# Altium PCB Main.PcbDoc
Units mil, origin at the board's own origin, x right, y up, seen from the top; angles counter-clockwise.
Board outline 1820 x 1990 mil, 4 copper layers (Top Layer, Mid Layer 1, Mid Layer 2, Bottom Layer), stack 62.327 mil thick; 41 components, 40 nets, 165 pads, 18 vias.
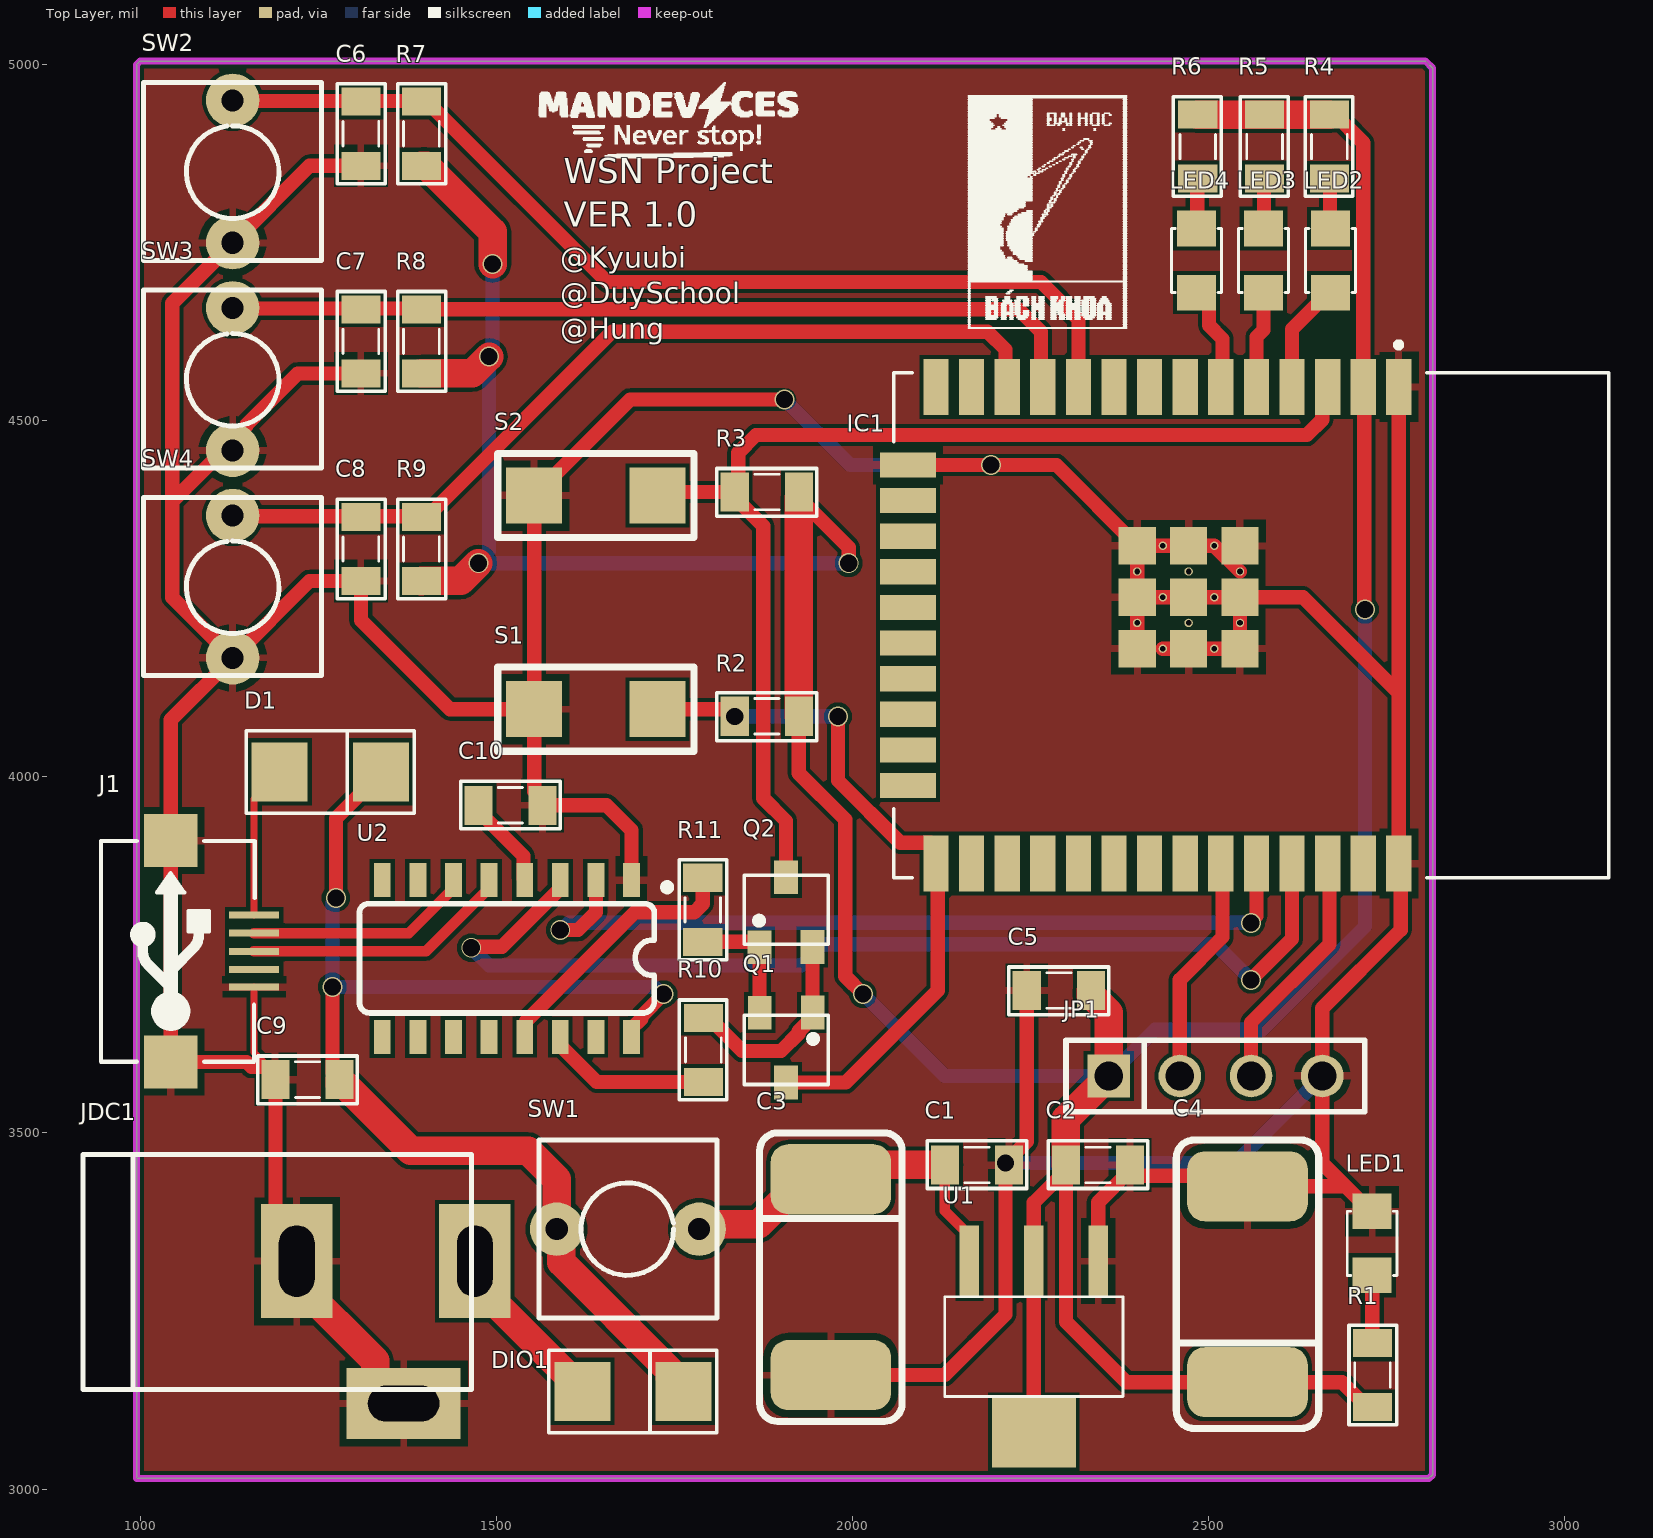
[diagram p0: Top Layer view]
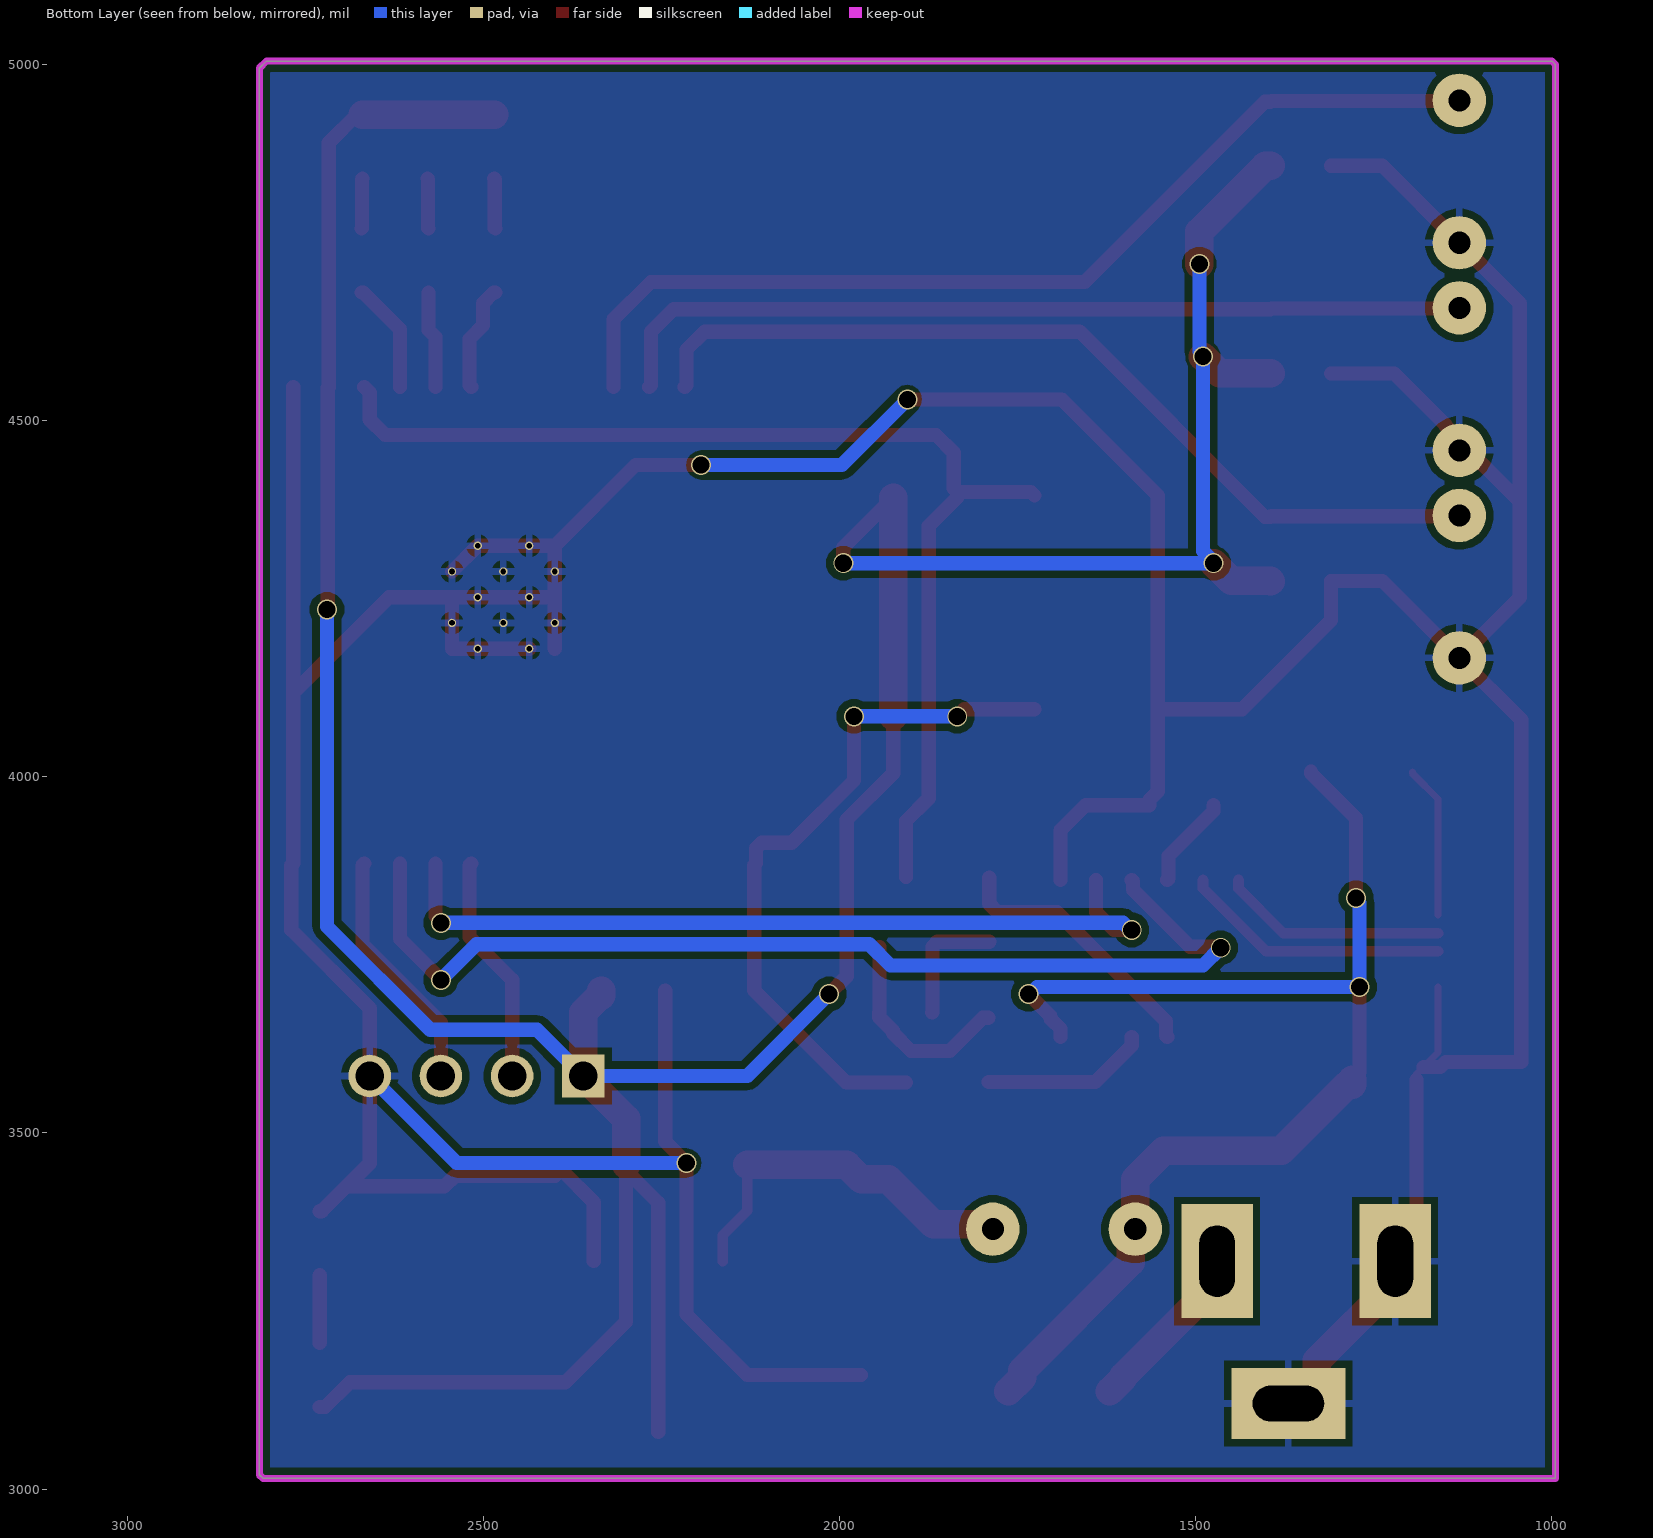
[diagram p1: Bottom Layer view, seen from below]
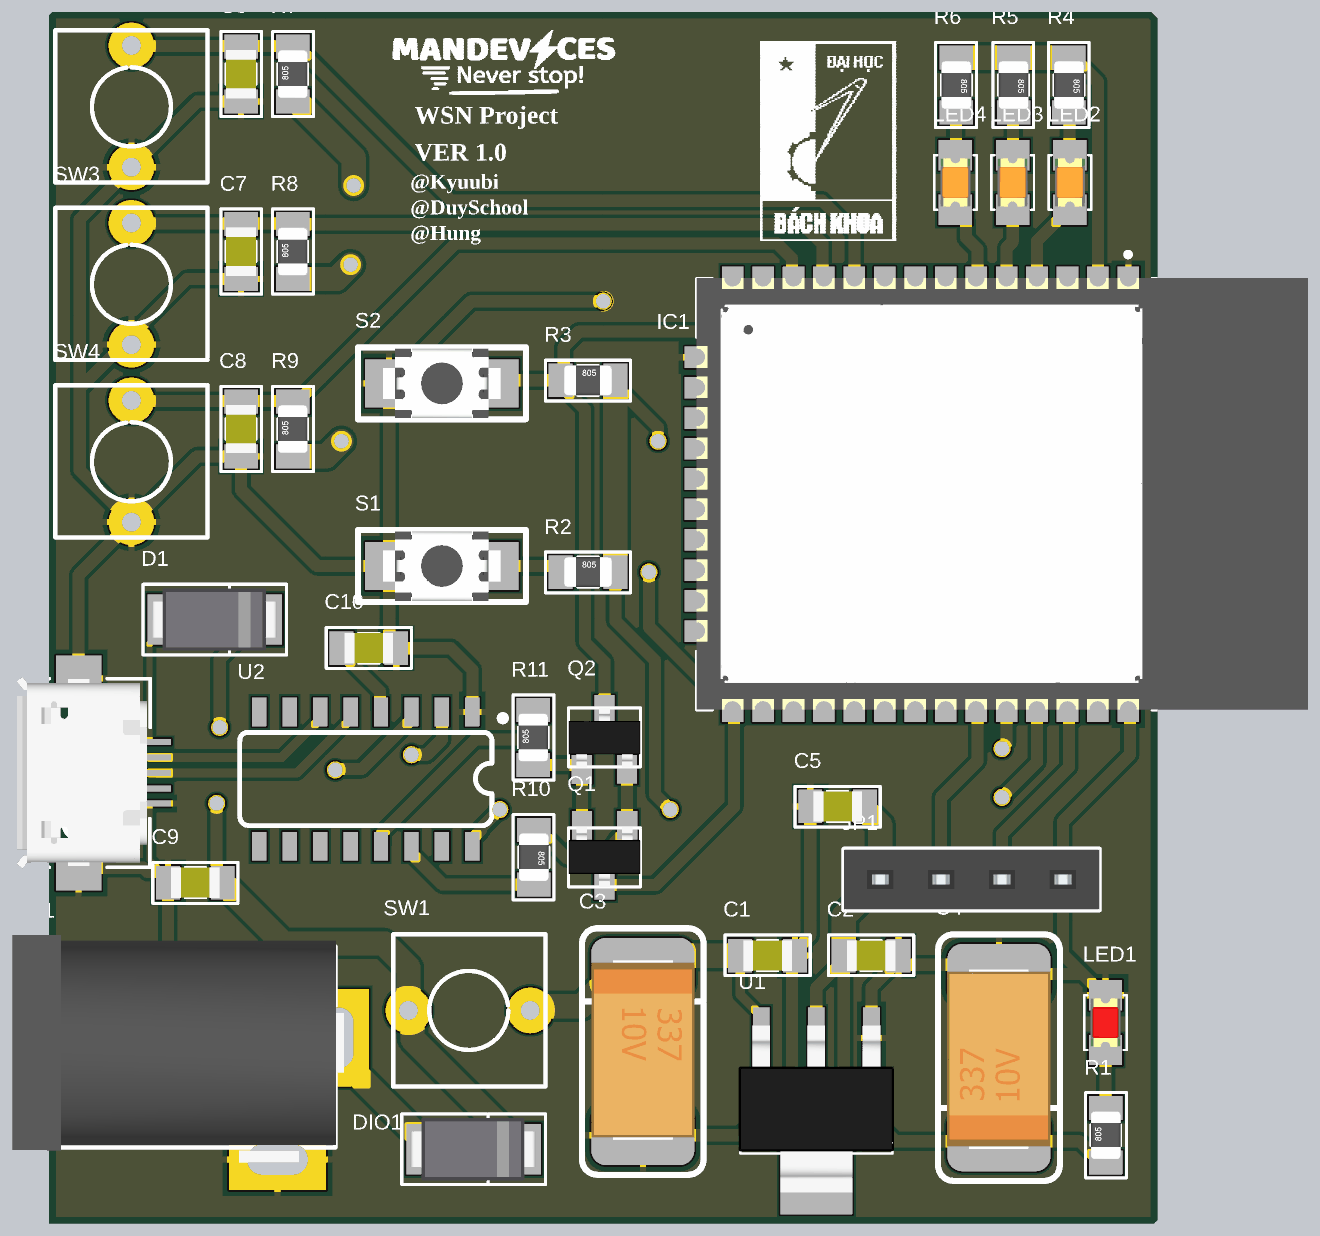
[diagram p2: 3D render of the assembled board from above, using the file's embedded part models]

## Layer stack, top to bottom
Top Solder: solder mask 0.4, Solder Resist, Dk 3.5
Top Layer: signal copper 1.4
Dielectric 2: core 2.756, FR-4, Dk 4.8
Mid Layer 1: signal copper 1.417
Dielectric 1: prepreg 51.181, Dk 4.2
Mid Layer 2: signal copper 1.417
Dielectric 3: core 2.756, Dk 4.2
Bottom Layer: signal copper 1.4
Bottom Solder: solder mask 0.4, Solder Resist, Dk 3.5

## Board outline
995,3015 995,5000 1000,5005 2805,5005 2815,4995 2815,3020 2810,3015

## Design rules (kind name [scope] priority, off if disabled: settings)
Clearance Polygon_ANT [(InNamedPolygon('Top_Layer-GND')) or  (InNamedPolygon('Mid_Layer_1-GND')) or (InNamedPolygon('Mid_Layer_2-GND')) or (InNamedPolygon('Bottom_Layer-GND')) vs InNet('RF')] p1: gap=10 ignorepadtopadclearanceinfootprint=FALSE
Clearance Polygon [(InNamedPolygon('Top_Layer-GND')) or  (InNamedPolygon('Mid_Layer_1-GND')) or (InNamedPolygon('Mid_Layer_2-GND')) or (InNamedPolygon('Bottom_Layer-GND'))] p2: gap=10 ignorepadtopadclearanceinfootprint=FALSE except(0: Arc-Hole Track-Hole SMDPad-Hole THPad-Hole Via-Hole Fill-Hole Poly-Hole Region-Hole Text-Hole)
Clearance Clearance_Top [OnLayer('Top Layer')] p3: gap=5.71 ignorepadtopadclearanceinfootprint=FALSE except(0: Arc-Hole Track-Hole SMDPad-Hole THPad-Hole Via-Hole Fill-Hole Poly-Hole Region-Hole Text-Hole)
Clearance [All] p4: gap=10 ignorepadtopadclearanceinfootprint=TRUE
ComponentClearance [All] p1 off: gap=10 collisioncheckmode=3 verticalgap=10 showdistances=FALSE
DiffPairsRouting [All] p1: maxlimit=10 minlimit=10 mostfreqgap=10 toplayer_minwidth=15 toplayer_maxwidth=15 toplayer_prefwidth=15 midlayer1_minwidth=15 midlayer1_maxwidth=15 midlayer1_prefwidth=15 midlayer2_minwidth=15 midlayer2_maxwidth=15 midlayer2_prefwidth=15 bottomlayer_minwidth=15 bottomlayer_maxwidth=15 bottomlayer_prefwidth=15 maxuncoupledlength=500
FabricationTestPointUsage TestPointUsage [All] p1: valid=0 allowmultiple=FALSE
FabricationTestpoint Testpoint [All] p1: side=3 testpointundercomponent=TRUE minsize=40 maxsize=100 preferedsize=60 minholesize=0 maxholesize=40 preferedholesize=32 testpointgrid=1 allowsidetop=TRUE allowsidebottom=TRUE usegrid=TRUE gridtolerance=0.01
Height [All] p1 off: minheight=0 maxheight=1000 prefheight=500
HoleSize [All] p1: absolutevalues=TRUE maxlimit=160 minlimit=3.94 maxpercent=80.000 minpercent=20.000
MinimumAnnularRing [All] p1 off: minimumring=6
PolygonConnect PolygonConnect_1 [isVia and innet(gnd)] p1: connectstyle=Direct reliefconductorwidth=10 reliefentries=4 polygonreliefangle="90 Angle" airgapwidth=10
PolygonConnect [All] p2: connectstyle=Relief reliefconductorwidth=10 reliefentries=4 polygonreliefangle="90 Angle" airgapwidth=10
RoutingVias [All] p1: holewidth=24 width=28 viastyle="Through Hole" minholewidth=20 minwidth=24 maxholewidth=24 maxwidth=28
SilkToSolderMaskClearance SilkscreenOverComponentPads [IsPad] p1: minsilkscreentomaskgap=10 clearancetoexposedcopper=TRUE
SolderMaskExpansion [All] p1: expansion=3 istentingtop=FALSE
Width [All] p1: maxlimit=40 minlimit=10 preferedwidth=20
23 further rules are at their usual default settings.

## Classes and differential pairs
component class POWER: C1 C2 C3 C4 DIO1 JDC1 LED1 R1 SW1 U1
component class Main: C5 C6 C7 C8 C9 C10 D1 IC1 J1 JP1 LED2 LED3 LED4 Q1 Q2 R2 R3 R4 R5 R6 R7 R8 R9 R10 R11 S1 S2 SW2 SW3 SW4 U2
differential pair D0: +D0_P -D0_N

## Components (designator, comment, footprint, x,y, rotation, side; value= is the part's Value field where it differs from the comment)
C1 "220nF" CAP_0805 2120,3610 r180 top value=33p
C2 "100nF" CAP_0805 2290,3610 r180 top value=33p
C3 "220uF/10V" CAP_7343 1970,3300 r270 top
C4 "220uF/10V" CAP_7343 2555,3285 r90 top
C5 "10uF" CAP_0805 2345,3545 r0 top value=33p
C6 "10uF" CAP_0805 1465,4958 r90 top value=33p
C7 "10uF" CAP_0805 1465,4666.5 r90 top value=33p
C8 "10uF" CAP_0805 1465,4375 r90 top value=33p
C9 "10uF" CAP_0805 1290,3420 r0 top value=33p
C10 "100nF" CAP_0805 1465,4115 r180 top value=33p
D1 "Diode SMD" DIO-214AC(SMA) 1270,4005 r180 top value=1N5007
DIO1 "Diode SMD" DIO-214AC(SMA) 1695,3135 r180 top value=1N5007
IC1 "ESP32-WROOM-32" MODULE_ESP32-WROOM-32 2560.43,4212.87 r270 top
J1 "USB-5" USB-M1 1160,3755 r90 top
JDC1 "Jac DC" DC-IN 1345,3220 r0 top
JP1 "Oled" JP4-C1T 2360,3580 r0 top
LED1 "LED" LED-0805-Red 2730,3300 r90 top value="LED 3 ly Single Colour"
LED2 "LED" LED-0805-Orange 2671.5,4770 r270 top value="LED 3 ly Single Colour"
LED3 "LED" LED-0805-Orange 2577.5,4770 r270 top value="LED 3 ly Single Colour"
LED4 "LED" LED-0805-Orange 2483.5,4770 r270 top value="LED 3 ly Single Colour"
Q1 "2SC1815" SOT23D 1907.07,3620 r180 top value=C1815
Q2 "2SC1815" SOT23D 1907.07,3810 r0 top value=C1815
R1 "1k" RES-SMD-0805 2730.5,3160 r90 top
R2 "10k" RES-SMD-0805 1880,4085 r0 top
R3 "10k" RES-SMD-0805 1880,4400 r0 top
R4 "10k" RES-SMD-0805 2670,4885 r270 top
R5 "10k" RES-SMD-0805 2579,4885 r270 top
R6 "10k" RES-SMD-0805 2485,4885 r270 top
R7 "10k" RES-SMD-0805 1395,4903 r90 top
R8 "10k" RES-SMD-0805 1395,4611.5 r90 top
R9 "10k" RES-SMD-0805 1395,4320 r90 top
R10 "10k" RES-SMD-0805 1791,3616.66 r270 top
R11 "10k" RES-SMD-0805 1790,3813.34 r90 top
S1 "SW-SMD" "SW 3x2x4" 1640,4095 r180 top
S2 "SW-SMD" "SW 3x2x4" 1640,4395 r180 top
SW1 "SW" SW2 1585,3365 r0 top value="SW chip 2 pin"
SW2 "SW" SW2 1130,4750 r90 top value="SW chip 2 pin"
SW3 "SW" SW2 1130,4458.5 r90 top value="SW chip 2 pin"
SW4 "SW" SW2 1130,4167 r90 top value="SW chip 2 pin"
U1 "LM1117-ADJ" LM1117-SOP 2255,3270 r180 top
U2 "CH340C" SOP-16 1515,3745 r180 top

## Footprints (in the part's own frame and the unit in brackets; to place one, negate y for a bottom-side part, rotate by r counter-clockwise, add the part's x,y. Pads: shape width x height; smd on the part's side, far side on the other; paste and mask are expansions set on the pad)
CAP_0805 [mil]
  rect 39.37x55 smd: 1(-100,155) 2(-10,155)
  silkscreen extent -125,121 15,188, body extent -95,130 -15,180, height 24
CAP_7343 [mm] "Capacitor Tantalum 7343"
  rrect50% 2.5x4.3 smd: 1(-3.429,0) 2(3.556,0)
  silkscreen extent -5.08,-2.54 5.21,2.54, body extent -3.75,-2.14 3.75,2.16, height 2.8
DC-IN [mil] "Jac DC input"
  rect 100x160 hole 50 slot 100 at 90 deg: 1(125,100) 2(-125,100)
  rect 160x100 hole 50 slot 100 at 0 deg: 3(25,-100)
  silkscreen extent -425,-80 120,250, body extent -410,-105 134,269, height 434
DIO-214AC(SMA) [mm] "DO-214AC Diode Smallest Size"
  rect 2x2.1 smd: 1(1.88,-0.051) 2(-1.732,-0.051)
  silkscreen extent -2.92,-1.52 3.07,1.42, body extent -2.5,-1.35 2.7,1.25, height 2.4
JP4-C1T [mm] "4 row, straight, gold plating"
  rect 1.52x1.52 hole 1.02: 1(0,0)
  round 1.52 hole 1.02: 2(2.54,0) 3(5.08,0) 4(7.62,0)
  silkscreen extent -1.52,-1.27 9.14,1.27, body extent -1.52,-1.25 9.14,1.25, height 8.51
LED-0805-Orange [mil]
  rect 50x55 smd: 1(0,0) 2(90,0)
  silkscreen extent 0,-35 90,35, body extent 5,-25 85,25, height 43
LED-0805-Red [mil]
  rect 50x55 smd: 1(0,0) 2(90,0)
  silkscreen extent 0,-35 90,35, body extent 5,-25 85,25, height 43
LM1117-SOP [mm]
  rect 0.7x2.54 smd: 1(-2.3,-1.27) 2(0,-1.27) 3(2.3,-1.27)
  rect 3x2.54 smd: 2(0,4.826)
  silkscreen extent -3.18,0 3.17,3.56, body extent -3.25,-1.78 3.25,5.18, height 1.68
MODULE_ESP32-WROOM-32 [mm]
  rect 2x0.9 smd: 1(-8.5,5.26) 2(-8.5,3.99) 3(-8.5,2.72) 4(-8.5,1.45) 5(-8.5,0.18) 6(-8.5,-1.09) 7(-8.5,-2.36) 8(-8.5,-3.63) 9(-8.5,-4.9) 10(-8.5,-6.17) 11(-8.5,-7.44) 12(-8.5,-8.71) 13(-8.5,-9.98) 14(-8.5,-11.25) 25(8.5,-11.25) 26(8.5,-9.98) 27(8.5,-8.71) 28(8.5,-7.44) 29(8.5,-6.17) 30(8.5,-4.9) 31(8.5,-3.63) 32(8.5,-2.36) 33(8.5,-1.09) 34(8.5,0.18) 35(8.5,1.45) 36(8.5,2.72) 37(8.5,3.99) 38(8.5,5.26)
  rect 0.9x2 smd: 15(-5.715,-12.25) 16(-4.445,-12.25) 17(-3.175,-12.25) 18(-1.905,-12.25) 19(-0.635,-12.25) 20(0.635,-12.25) 21(1.905,-12.25) 22(3.175,-12.25) 23(4.445,-12.25) 24(5.715,-12.25)
  rect 1.33x1.33 smd: 39_1(-2.835,-0.405) 39_2(-1,-0.405) 39_3(0.835,-0.405) 39_4(-2.835,-2.24) 39_5(-1,-2.24) 39_6(0.835,-2.24) 39_7(-2.835,-4.075) 39_8(-1,-4.075) 39_9(0.835,-4.075)
  round 0.3 hole 0.2: 39_10(-1.917,-0.405) 39_11(-0.082,-0.405) 39_12(-2.835,-1.322) 39_13(-1,-1.322) 39_14(0.835,-1.322) 39_15(-1.917,-2.24) 39_16(-0.082,-2.24) 39_17(-2.835,-3.157) 39_18(-1,-3.157) 39_19(0.835,-3.157) 39_20(-1.917,-4.075) 39_21(-0.082,-4.075)
  silkscreen extent -10.1,-12.75 9,12.75, body extent -9.02,-12.75 8.98,12.75, height 3.2
RES-SMD-0805 [mil]
  rect 39.37x55 smd: 1(-45,0) 2(45,0)
  silkscreen extent -70,-34 70,33, body extent -39,-25 39,25, height 31
SOP-16 [mm]
  rect 0.6x1.2 smd: 1(-4.445,-2.8) 2(-3.175,-2.8) 3(-1.905,-2.8) 4(-0.635,-2.8) 5(0.635,-2.8) 6(1.905,-2.8) 7(3.175,-2.8) 8(4.445,-2.8) 9(4.445,2.8) 10(3.175,2.8) 11(1.905,2.8) 12(0.635,2.8) 13(-0.635,2.8) 14(-1.905,2.8) 15(-3.175,2.8) 16(-4.445,2.8)
  silkscreen extent -5.84,-2.67 5.26,1.95, body extent -4.95,-3.47 4.95,3.47, height 1.75
SOT23D [mm] "SOT 23C - 1-3-2 - BCE"
  rect 0.85x1.2 smd: 1(-0.95,-1.25) 2(0.94,-1.245) 3(0,1.25)
  silkscreen extent -1.5,-1.14 1.5,1.32, body extent -1.5,-1.17 1.5,1.33, height 1.06
SW2 [mil] "SW button 2pin, 250x 250 mil"
  round 75 hole 31: 1(0,0) 2(200,0)
  silkscreen extent -25,-125 225,125
"SW 3x2x4" [mm]
  rect 2x2 smd: 1(-2.2,0) 2(2.2,0)
  silkscreen extent -3.5,-1.5 3.5,1.5, body extent -2.45,-1.45 2.45,1.45, height 2
USB-M1 [mil]
  rect 10x70 smd: 1(51.18,0) 2(25.59,0) 3(0,0) 4(-25.59,0) 5(-50,0)
  rect 74.8x74.8 smd: 5(-155.51,116.84) 5(155.51,116.84)
  silkscreen extent -155,-1 155,215, body extent -157,5 158,218, height 107

## Part data
C1 C2 C5 C6 C7 C8 C9 C10: library part CapSMD, "Capacitor", LatestRevisionDate=17-Jul-2002, LatestRevisionNote="Re-released for DXP Platform.", PackageReference=RAD-0.3, Published=8-Jun-2000, Publisher="Altium Limited"
C3 C4: library part CAP_TAN_SMD, "Polazied Tantalum Capacitor"
D1 DIO1: "Default Diode", Code - JEDEC=DO-214-AB, Published=8-Jun-2000, Publisher="Altium Limited", Revision="July-2002: Re-released for DXP Platform."
IC1: "Bluetooth, WiFi Transceiver Module 2.4GHz ~ 2.5GHz Surface Mount", Package="Module Espressif Systems", Digi-Key_Part_Number=1904-1010-1-ND, Digi-Key_Purchase_URL=https://www.digikey.com/product-detail/en/espressif-systems/ESP32-WROOM-32/1904-1010-1-ND/8544305?utm_source=snapeda&utm_medium=aggregator&utm_campaign=symbol, MF="Espressif Systems", MP=ESP32-WROOM-32, SnapEDA_Link=https://www.snapeda.com/parts/ESP32-WROOM-32/Espressif%20Systems/view-part/2753322/?ref=snap
J1: Manufacturer=FCI, Manufacturer Part Number=10118193-0001LF, Supplier Part Number 1=609-4616-1-ND, .Checked PCB=RF, .Checked SCH=MM, .Creator=MM, Category="Connectors, Interconnects", ComponentLink1Description=http://portal.fciconnect.com/Comergent//fci/drawing/10118193.pdf, ComponentLink1URL=http://portal.fciconnect.com/Comergent//fci/drawing/10118193.pdf, Connector Type="USB - micro B", Features="Shielded, Solder Retention", Gender=Receptacle, Ingress Protection=-, Mounting Type="Surface Mount, Right Angle, Horizontal", Number of Contacts=5, Packaging="Cut Tape (CT)", Pricing 1="1=0.46, 10=0.433, 25=0.3712, 50=0.3156, 100=0.3032, 250=0.27224, 500=0.25988 (USD)", RoHS="RoHS Compliant", Specifications="USB 2.0", Stock 1=28642, Supplier 1=Digi-Key
JDC1: library part DCIN, "Jac DC input"
JP1: library part JP4, "WR-PHD 2.54 mm Angled Socket Header", Manufacturer="W¨¹rth Elektronik eiSos GmbH", partNo=613004143121, ComponentLink1 Description=Manufacturer, ComponentLink1URL=http://www.we-online.com, ComponentLink2 Description=Datasheet, ComponentLink2URL=http://katalog.we-online.de/em/datasheet/6130xx143121.pdf, Created by="Karrer Zheng", Created Date="29 March 2013", NoPins=04
LED1 LED2 LED3 LED4: "LED Single colour Green and Red"
Q1 Q2: library part C1815, "NPN 600mW, ECB"
R1 R2 R3 R4 R5 R6 R7 R8 R9 R10 R11: library part "Resistor - SMD", "Resistor SMD", Manufacturer="Generic Components", Class=Passive, Published=08/06/2000, Publisher="Altium Hobart Technology Centre"
S1 S2: "Switch", LatestRevisionDate=17-Jul-2002, LatestRevisionNote="Re-released for DXP Platform.", PackageReference=SPST-2, Published=24-Mar-1999, Publisher="Altium Limited"
SW1 SW2 SW3 SW4: library part SW2, "Switch button 2 pin"
U1: "800mA Low-Dropout Linear Regulator", Creator="Nguyen Ba Bien", Website=http://group3i.net
U2: "USB to serial chip CH340", Package=Package, Availability=Unavailable, Check_prices=https://www.snapeda.com/parts/CH340C/WCH/view-part/5428851/?ref=eda, MF=WCH, MP=CH340C, Price=None, SnapEDA_Link=https://www.snapeda.com/parts/CH340C/WCH/view-part/5428851/?ref=snap

## Via types
v1: diameter 28, hole 24, Top Layer to Bottom Layer, 18 vias

## Nets (pads, with @x,y where several pads share a name; then routed paths per layer and width w, separated by ;. In a path a pad name is that pad's centre, name@x,y a point inside that pad or via, vN(x,y) a via of type N, cw(c..) or ccw(c..) an arc to the next point about the centre after c; other vN are vias at no path point)
3V3: C2.2 C4.1 C5.2 IC1.2 JP1.1 R1.1 R2.2 R3.2 R4.1 R5.1 R6.1 R7.1 R8.1 R9.1 U1.2 | length 5747.3
  Top Layer w20: R2.2 1925,4005 1990,3940 1990,3720 v1(2015,3695) ; R3.2 1925,4392.19 1995,4322.18 v1(1995,4300) ; U1.2@2255,3080 2255,3320 2255,3402.19 C2.2@2300,3447.19 ; C2.2 C2.2@2300,3447.19 ; R4.1 2677.81,4930 2717.52,4890.3 IC1.2 2718.76,4546.28 2718.76,4236.24 v1(2720,4235) ; R1.1 2722.69,3115 2687.68,3150 C4.1 2385,3150 2300,3235 C2.2@2300,3447.19
  Top Layer w40: R9.1 1395.31,4275.31 1450.31,4275.31 v1(1475,4300) ; R8.1 1466.5,4566.5 v1(1490,4590) ; R7.1 1402.19,4858 1495,4765.18 v1(1495,4720) ; R2.2 R3.2@1925,4392.19 ; C2.2 2300,3520 JP1.1 2360,3669.07 2336.57,3692.5 2335.31,3692.5 2335,3692.81 C5.2 ; R6.1 R5.1 R4.1
  Bottom Layer w20: v1(1495,4720) 1495,4597.16 1490,4592.16 v1(1490,4590) 1490,4317.16 1475,4302.16 v1(1475,4300) v1(1995,4300) ; v1(2015,3695) 2130,3580 JP1.1 2425,3645 2575,3645 2720,3790 v1(2720,4235)
5V: C9.2 D1.2 DIO1.2 SW1.1 U2.16 | length 1751.4
  Top Layer w20: v1(1270,3705) 1270,3604.22 1270.31,3603.9 1270.31,3584.69 C9.2 ; v1(1275,3830) 1275,3941.83 1338.2,4005.03 D1.2 ; U2.16 1690,3646.57 1703.89,3660.46 1703.89,3663.89 v1(1735,3695)
  Top Layer w40: C9.2 1280,3567.81 1280.31,3567.5 1287.5,3567.5 1380,3475 1545,3475 1585,3435 SW1.1 1591.7,3358.3 1591.7,3318.3 1743.83,3166.17 1743.83,3156.37 DIO1.2
  Bottom Layer w20: v1(1275,3830) 1275,3827.84 1270,3822.84 v1(1270,3705) 1722.84,3705 1732.84,3695 v1(1735,3695)
D0_N: J1.2 U2.6 | length 317.8
  Top Layer w15: J1.2 1377.17,3780.59 1440,3843.43 U2.6
D0_P: J1.3 U2.5 | length 378.4
  Top Layer w15: J1.3 1401.57,3755 1490,3843.43 U2.5
GND: C1.1 C2.1 C3.2 C4.2 C5.1 C6.1 C7.1 C8.1 C9.1 C10.1 IC1.1 IC1.15 IC1.38 IC1.39_1 IC1.39_2 IC1.39_3 IC1.39_4 IC1.39_5 IC1.39_6 IC1.39_7 IC1.39_8 IC1.39_9 IC1.39_10 IC1.39_11 IC1.39_12 IC1.39_13 IC1.39_14 IC1.39_15 IC1.39_16 IC1.39_17 IC1.39_18 IC1.39_19 IC1.39_20 IC1.39_21 J1.5 JDC1.2 JDC1.3 JP1.4 LED1.2 S1.2 S2.2 SW2.1 SW3.1 SW4.1 U1.1 U2.1 | length 8832.4
  Top Layer w10: J1.5@1160,3705 1160,3612.81 1180.31,3592.5 1190,3582.81 C9.1
  Top Layer w20: C9.1@1180.31,3592.5 1156.48,3592.5 1149.49,3599.49 1043.16,3599.49 1043.16,3910.51 1043.16,4080.16 SW4.1 ; C9.1 1190,3350 JDC1.2 ; C7.1 1221.5,4566.5 1149.48,4494.48 1149.48,4492.86 1130,4473.38 SW3.1 1117,4458.5 1045,4386.5 ; C6.1 1238,4858 SW2.1 1045,4665 1045,4386.5 ; U2.1 1690,3925 1655,3960 C10.1 1565,3967.81 1553.39,3979.43 S1.2 ; v1(1905,4530) 1688.39,4530 S2.2 S1.2 ; C3.2 2130,3160 2215,3245 C1.1@2215,3455 ; IC1.15 v1(2195,4437.87) 2286.61,4437.87 IC1.39_7 ; C1.1 2217.81,3455 v1(2215,3457.81) 2245,3487.81 C5.1 ; U1.1 2345.55,3402.74 2390,3447.19 C2.1@2390,3449.68 ; C2.1 C2.1@2390,3449.68 ; IC1.39_9 IC1.39_21 IC1.39_8 ; IC1.39_19 IC1.39_6 IC1.39_14 IC1.39_3 IC1.39_11 IC1.39_2 ; IC1.39_10 IC1.39_12 IC1.39_4 IC1.39_17 IC1.39_7 ; LED1.2 2727.5,3390 2692.5,3425 ; IC1.1 2767.52,4117.48 ; 1045,4386.5 1045,4252 SW4.1 ; SW4.1 1238,4275 C8.1 1310,4220 1435,4095 S1.2 ; C2.1@2390,3449.68 2399.69,3440 2540,3440 C4.2 2692.5,3425 ; IC1.39_8 IC1.39_18 IC1.39_5 IC1.39_13 IC1.39_2 ; IC1.39_8 IC1.39_20 IC1.39_7 ; IC1.39_2 2632.76,4252.24 2767.52,4117.48 ; 2692.5,3425 2660,3457.5 JP1.4 2660,3675 2770,3785 2770,3875.75 IC1.38 2767.52,4117.48
  Top Layer w40: JDC1.2 1220,3290 1330,3180 1330,3150 1360,3120 JDC1.3
  Bottom Layer w20: v1(1905,4530) 1997.13,4437.87 v1(2195,4437.87) ; v1(2215,3457.81) 2537.81,3457.81 JP1.4
GPIO0: IC1.25 Q1.3 R2.1 S1.1 | length 978
  Top Layer w20: S1.1 R2.1@1825.31,4095 ; Q1.3 1990.79,3570.79 2120,3700 2120,3875.75 IC1.25 2117.52,3899.88 2109.8,3907.6 2067.4,3907.6 1980,3995 v1(1980,4085)
  Bottom Layer w20: v1(1835,4085) v1(1980,4085)
GPIO2: IC1.24
GPIO4: IC1.4 LED2.2 | length 156.3
  Top Layer w20: IC1.4 2617.52,4628.52 2669,4680 LED2.2
GPIO5: IC1.29
GPIO12: IC1.14
GPIO13: IC1.5 LED3.2 | length 136.6
  Top Layer w20: IC1.5 2567.52,4617.52 2577.5,4627.5 LED3.2
GPIO14: IC1.13
GPIO15: IC1.6 LED4.2 | length 150.1
  Top Layer w20: LED4.2 2486,4680 2501,4665 2501,4634 2520,4615 2520,4550 IC1.6
GPIO16: IC1.27
GPIO17: IC1.28
GPIO18: IC1.30
GPIO19: IC1.31
GPIO21: IC1.33 JP1.2 | length 324.1
  Top Layer w20: JP1.2 2460,3715 2520,3775 2520,3875.75 IC1.33
GPIO22: IC1.36 JP1.3 | length 344.8
  Top Layer w20: JP1.3 2560,3655 2670,3765 2670,3875.75 IC1.36
GPIO23: IC1.37
GPIO25: C6.2 IC1.10 R7.2 SW2.2 | length 1409.9
  Top Layer w20: SW2.2 1131,4949 1394,4949 R7.2 1402.81,4948 1655.81,4695 2265,4695 2317.52,4642.48 IC1.10
GPIO26: C7.2 IC1.11 R8.2 SW3.2 | length 1227.4
  Top Layer w20: SW3.2 1131,4657.5 1394,4657.5 R8.2 2233.5,4656.5 2265,4625 2265,4550.04 IC1.11
GPIO27: C8.2 IC1.12 R9.2 SW4.2 | length 1257.4
  Top Layer w20: SW4.2 1131,4366 1394,4366 R9.2 1402.81,4365 1662.82,4625 2190,4625 2215,4600 2215,4550.04 IC1.12
GPIO32: IC1.8
GPIO33: IC1.9
NetC1_2: C1.2 C3.1 SW1.2 U1.3 | length 531.5
  Top Layer w15: C1.2 2130,3390.67 2164.45,3356.22 U1.3
  Top Layer w40: SW1.2 1791.7,3371.7 1868.77,3371.7 1932.07,3435 C3.1 1990,3455 C1.2
NetC10_2: C10.2 U2.4 | length 131.7
  Top Layer w20: C10.2 1475,3952.19 1538.19,3889 1538.19,3857.05 U2.4
NetD1_1: D1.1 J1.1 | length 215.7
  Top Layer w10: J1.1 1160,3969.03 1196,4005.03 D1.1
NetDIO1_1: DIO1.1 JDC1.1 | length 245.5
  Top Layer w40: JDC1.1 1470,3290 1601.63,3158.37 1601.63,3156.37 DIO1.1
NetLED1_1: LED1.1 R1.2 | length 95.2
  Top Layer w20: LED1.1 2730.25,3299.75 2730.25,3205.25 R1.2
NetLED2_1: LED2.1 R4.2 | length 70.6
  Top Layer w20: R4.2 2670.75,4839.25 2670.75,4770.75 LED2.1
NetLED3_1: LED3.1 R5.2 | length 70.6
  Top Layer w20: LED3.1 2578.25,4770.75 2578.25,4839.25 R5.2
NetLED4_1: LED4.1 R6.2 | length 70.6
  Top Layer w20: LED4.1 2484.25,4770.75 2484.25,4839.25 R6.2
NetQ1_1: Q1.1 Q2.2 R10.1 | length 292.9
  Top Layer w20: R10.1 1798.81,3661.67 1845.48,3615 1900,3615 1925,3640 1925,3642.85 1944.48,3662.32 Q1.1 1944.28,3669.41 1944.28,3760.8 Q2.2
NetQ1_2: Q1.2 Q2.1 R11.1 | length 175.2
  Top Layer w20: R11.1 1862.94,3768.33 1869.67,3761.6 Q2.1 1869.87,3760.59 1869.87,3669.2 Q1.2
NetR10_2: R10.2 U2.14 | length 234.1
  Top Layer w20: U2.14 1590,3622.95 1641.29,3571.67 R10.2
NetR11_2: R11.2 U2.13 | length 375.9
  Top Layer w20: U2.13 1541.81,3636.57 1541.81,3656.81 1695,3810 1778.28,3810 1790,3821.72 R11.2
nRST: IC1.3 Q2.3 R3.1 S2.1 | length 1626.4
  Top Layer w20: S2.1 1731.61,4400 R3.1 ; Q2.3 1907.07,3937.93 1875,3970 1875,4352.18 1835,4392.19 R3.1 ; IC1.3 2659.8,4539.8 2659.8,4501.52 2638.28,4480 1865,4480 1840,4455 1840,4405 R3.1
RX0: IC1.34 U2.2 | length 1166.1
  Top Layer w20: v1(1590,3785) 1615,3785 1640,3810 U2.2 ; v1(2560,3795) 2560,3797.16 2567.52,3804.68 IC1.34
  Bottom Layer w20: v1(1590,3785) 1592.16,3785 1602.16,3795 v1(2560,3795)
RXI: IC1.35 U2.3 | length 1496.9
  Top Layer w20: v1(1465,3760) 1466.53,3761.53 1508.11,3761.53 1588.19,3841.61 1588.19,3853.43 U2.3 ; v1(2560,3715) 2617.52,3772.52 IC1.35
  Bottom Layer w20: v1(1465,3760) 1490,3735 1928.58,3735 1958.58,3765 2510,3765 v1(2560,3715)
pads on no net: IC1.7 IC1.16 IC1.17 IC1.18 IC1.19 IC1.20 IC1.21 IC1.22 IC1.23 IC1.26 IC1.32 J1.4 U2.7 U2.8 U2.9 U2.10 U2.11 U2.12 U2.15

## Polygon pours and split planes (outlines as drawn)
GND on Top Layer "Kyuubi" (solid, remove dead copper, pour order 0): 2835,5050 945,5050 945,2975 960,2990 2835,2990
GND on Bottom Layer "Kyuubi" (solid, remove dead copper, pour order 1): 2840,2945 2845,2940 2835,2930 935,2930 935,5035 940,5030 2840,5030

## Keep-outs
Keep-Out Layer:
  the board outline again, w10

## Silkscreen, mask and mechanical layers (free items; w line width, h text height)
Top Overlay:
  drawing of 1603 lines, arcs and shapes, not listed
  text "WSN Project" at 1595.06,4821.71 h60
  text "VER 1.0" at 1595.06,4760.83 h60
  text "@Kyuubi / @DuySchool / @Hung" at 1590,4605 h50

## Text inside footprints (layer, text, board x,y; h text height)
IC1: Mechanical 13 "ANTENNA" at 2914.76,4449.09 h40 r270